# Altium PCB PCB1.PcbDoc
Units mm, origin at the board's own origin, x right, y up, seen from the top; angles counter-clockwise.
Board outline 103.55 x 81.04 mm, 2 copper layers (Top Layer, Bottom Layer); 36 components, 49 nets, 183 pads, 26 vias.
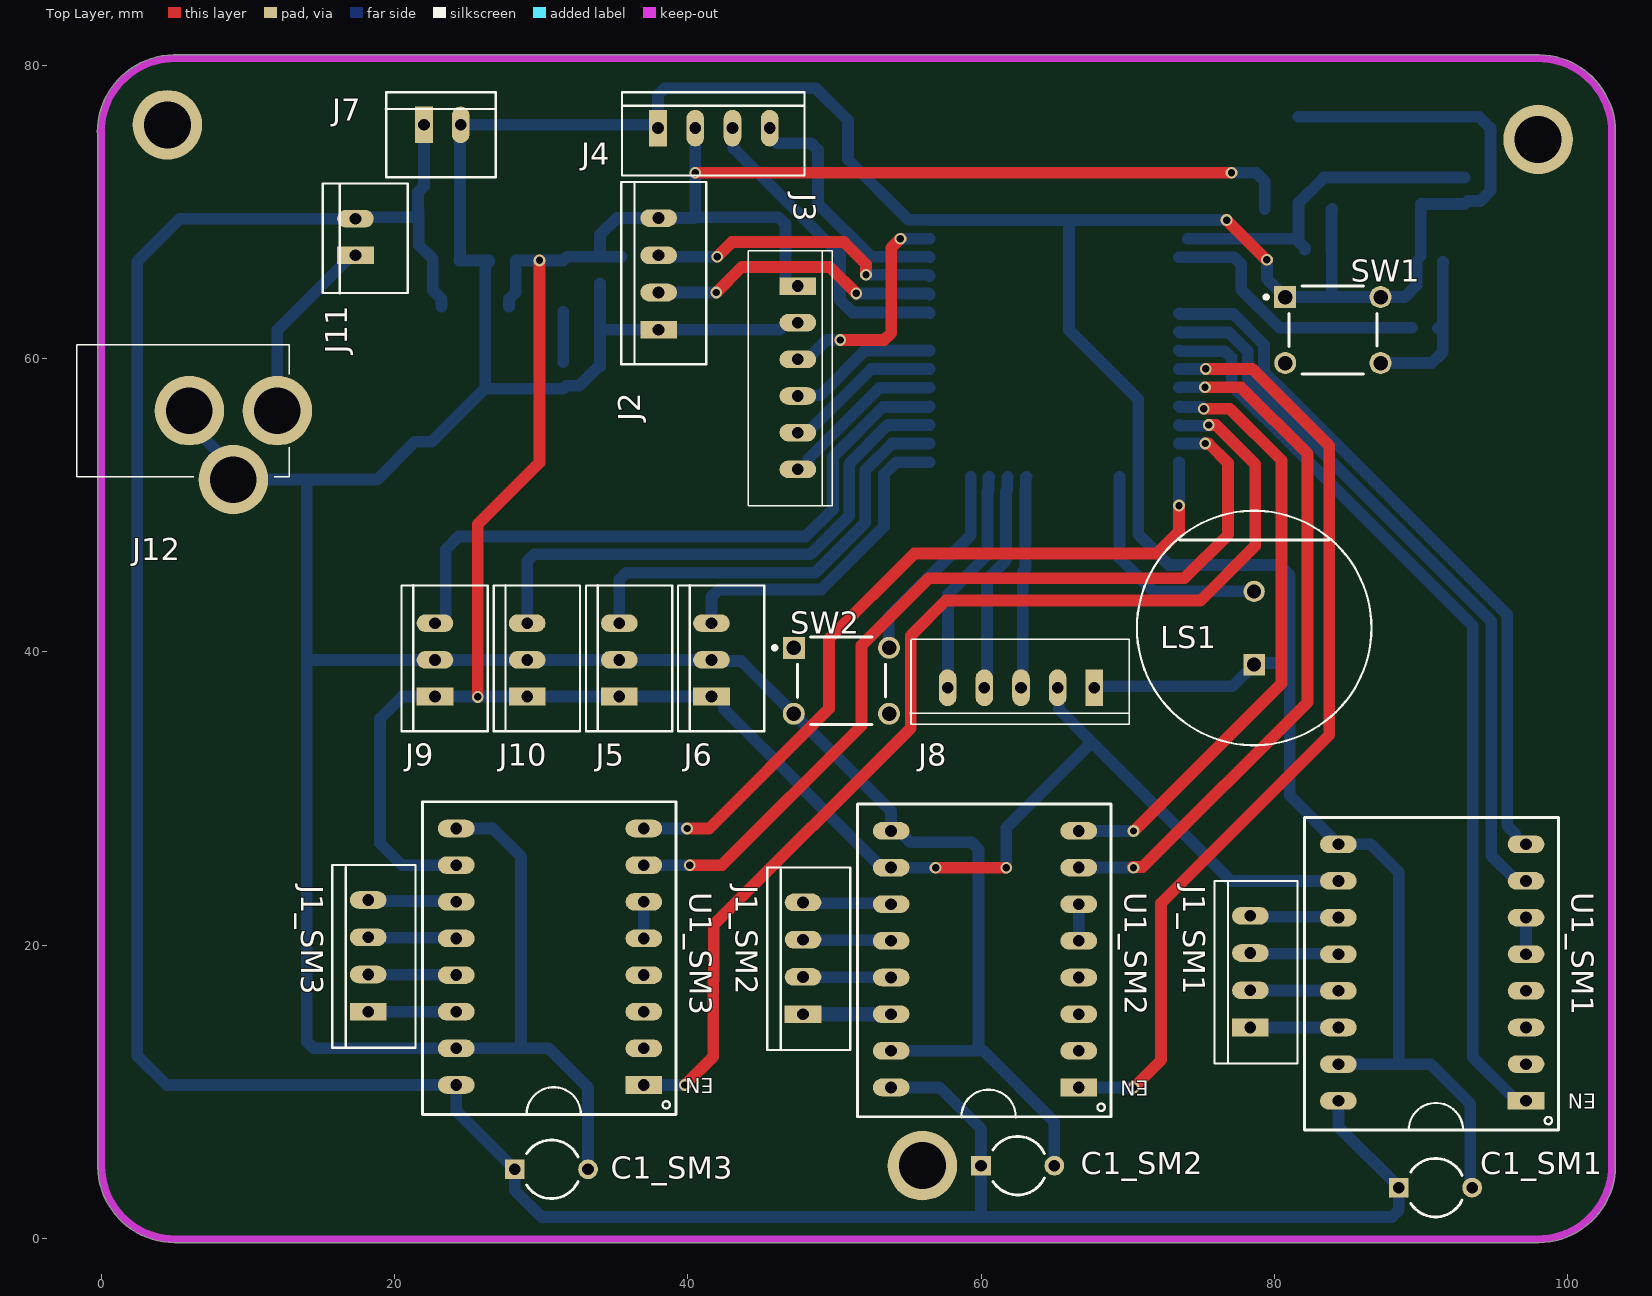
[diagram p0: Top Layer view]
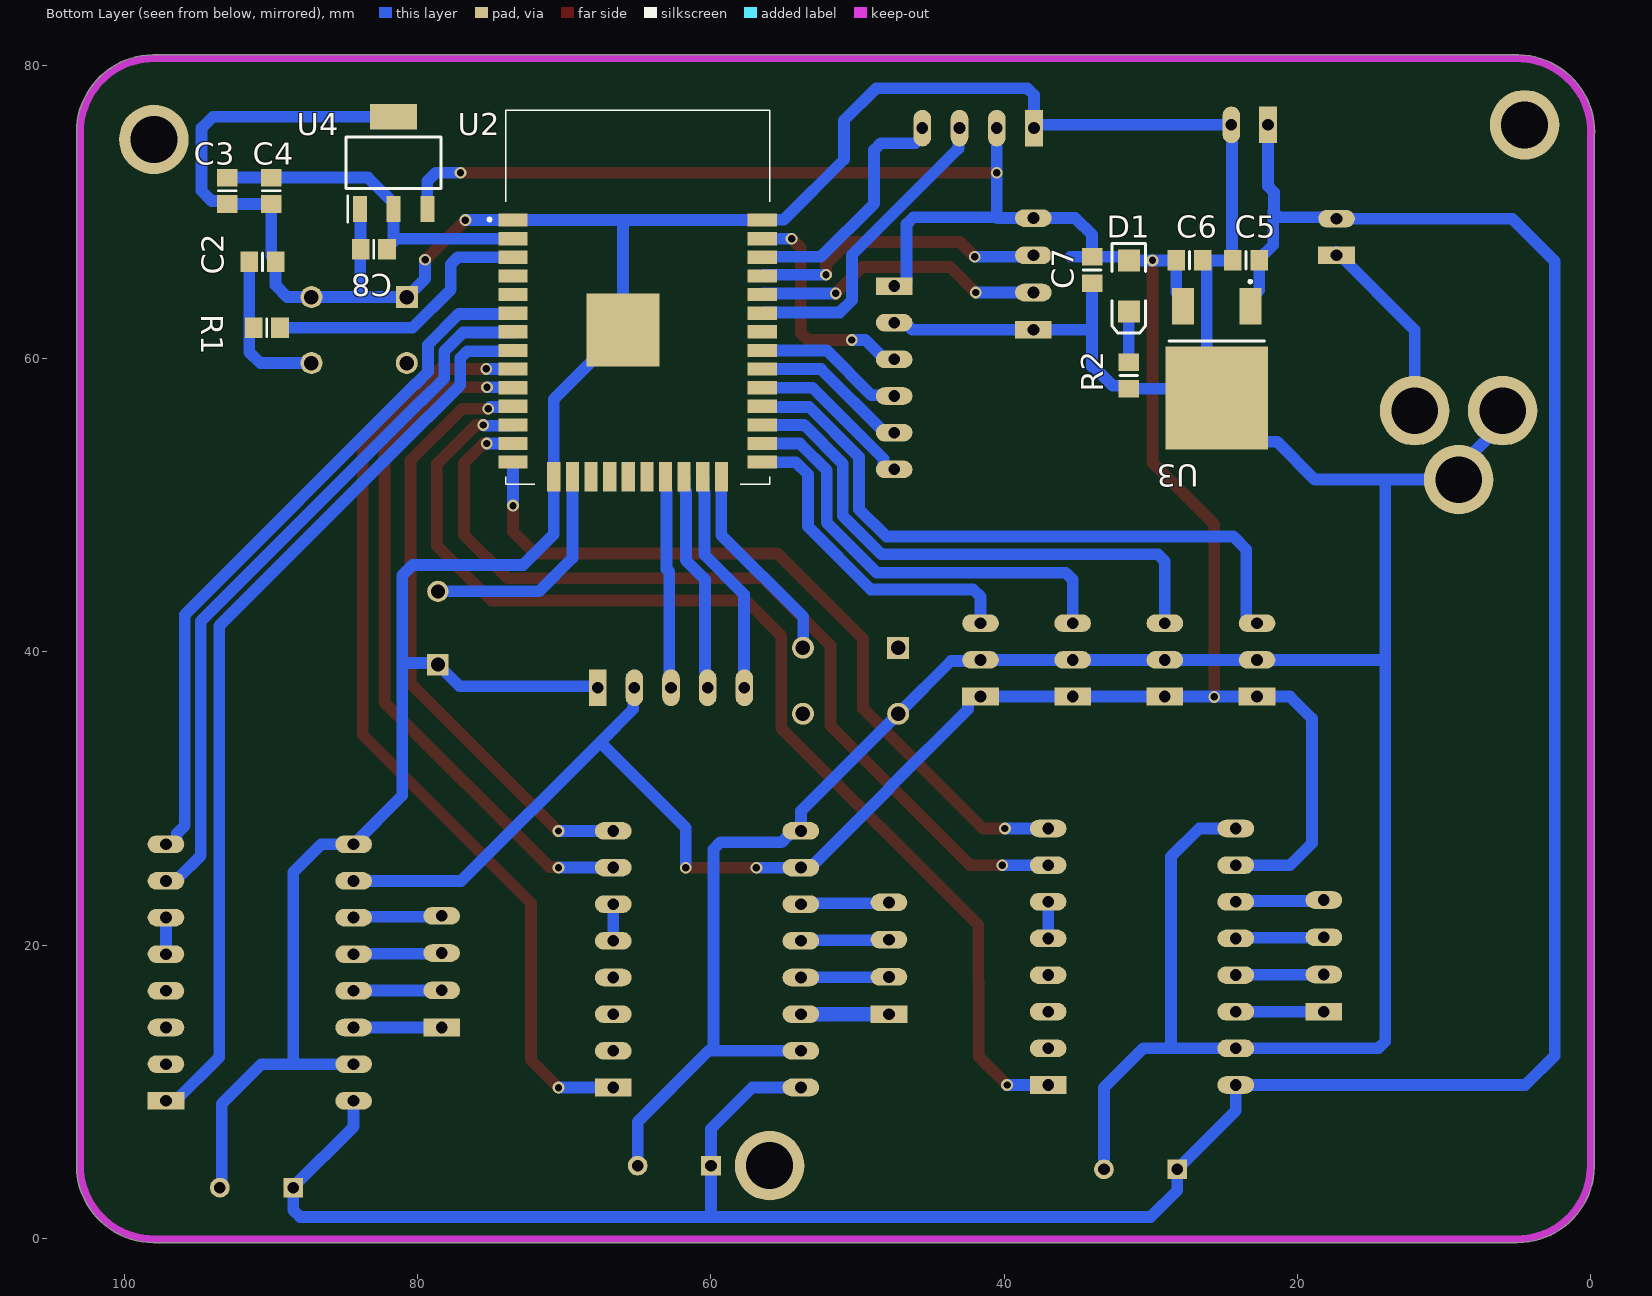
[diagram p1: Bottom Layer view, seen from below]
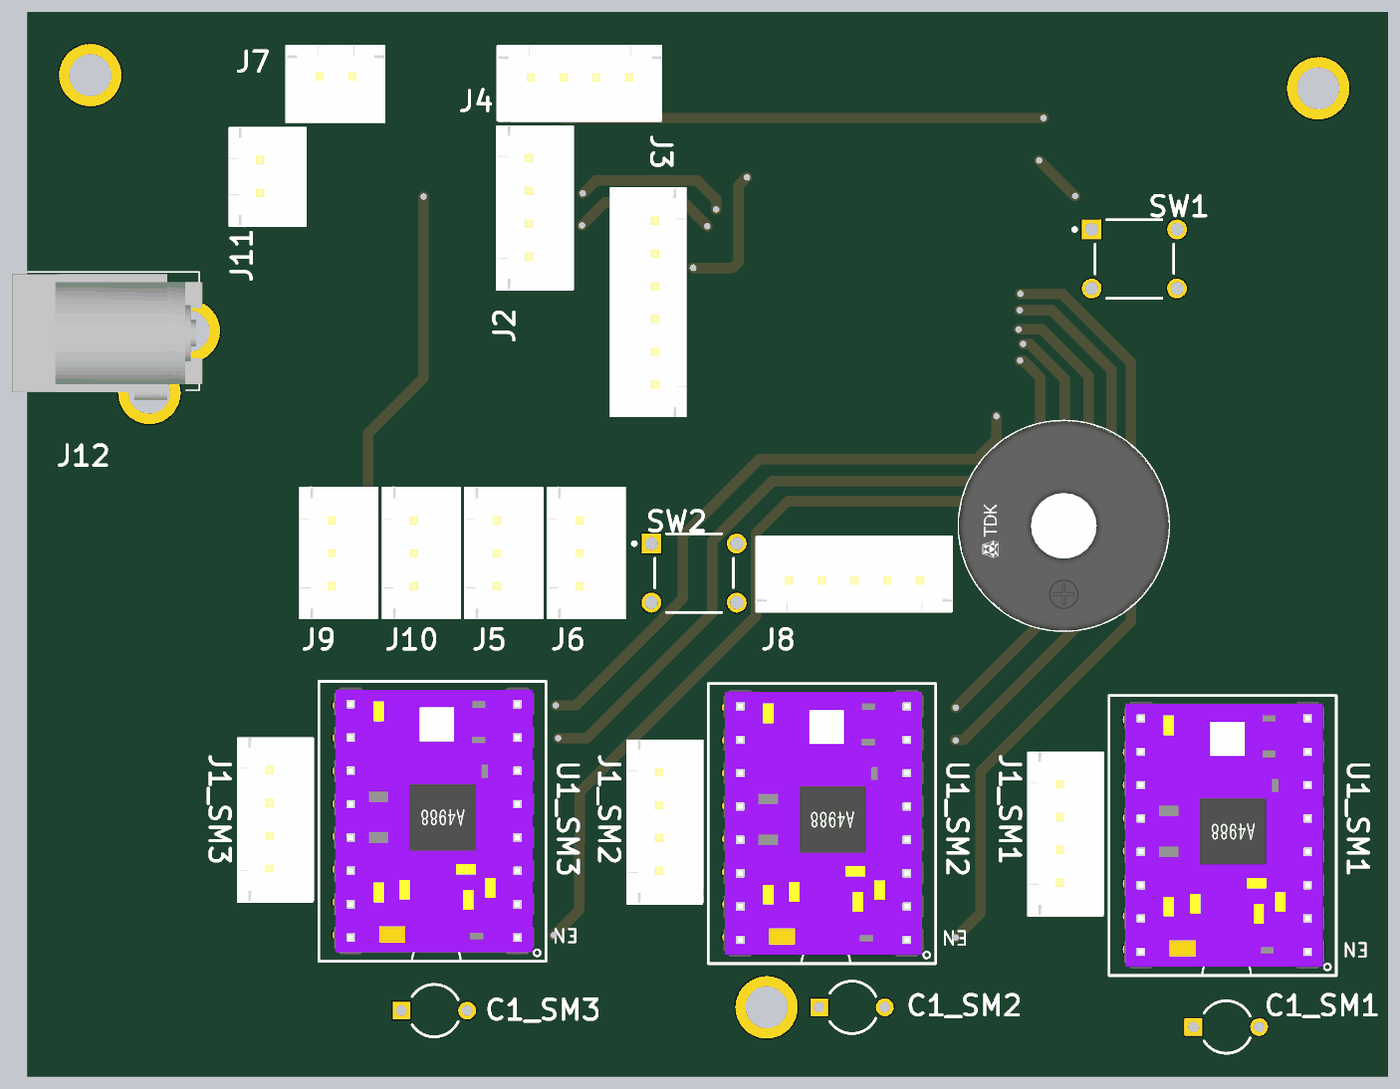
[diagram p2: 3D render of the assembled board from above, using the file's embedded part models]

## Layer stack, top to bottom
Top Solder: solder mask 0.0102, Solder Resist, Dk 3.5
Top Layer: signal copper 0.0356
Dielectric 1: dielectric 0.32, FR-4, Dk 4.8
Bottom Layer: signal copper 0.0356
Bottom Solder: solder mask 0.0102, Solder Resist, Dk 3.5

## Board outline
-0.25,4.869 cw(c-0.013,4.95) -0.263,4.95 -0.263,4.963 cw(c-0.013,4.963) -0.25,5.043 -0.25,75.339 cw(c-0.026,75.45) -0.276,75.45 cw(c5,75.45) 4.906,80.726 cw(c5,80.493) 5,80.744 97.983,80.744 cw(c97.983,80.493) 98.076,80.726 cw(c98,75.45) 103.276,75.45 cw(c103.026,75.45) 103.25,75.339 103.25,5.087 cw(c103.026,4.976) 103.276,4.976 cw(c98,4.976) 98.033,-0.3 cw(c98.026,-0.05) 98.026,-0.3 5,-0.3 cw(c5,-0.05) 4.998,-0.3 ccw(c5,4.95) 5,-0.3 4.998,-0.3 cw(c5,4.95)

## Design rules (kind name [scope] priority, off if disabled: settings)
Clearance [All] p1: gap=0.3 ignorepadtopadclearanceinfootprint=FALSE except(1: Arc-Fill Arc-Poly Arc-Region Track-Fill Track-Poly Track-Region)
PolygonConnect [All] p1: connectstyle=Relief reliefconductorwidth=0.254 reliefentries=4 polygonreliefangle="90 Angle" airgapwidth=0.254
RoomDefinition Sheet [InComponentClass('Sheet')] p1: confinementstyle=ConfineIn formatcopy=TRUE lockcomponents=FALSE outline -3.412,31.674 103.088,31.674 103.088,78.674 -3.412,78.674
RoomDefinition SM2 [InComponentClass('SM2')] p2: confinementstyle=ConfineIn formatcopy=TRUE lockcomponents=FALSE outline 44,30.45 44,1.95 72,1.95 72,30.45
RoomDefinition SM1 [InComponentClass('SM1')] p3: confinementstyle=ConfineIn formatcopy=TRUE lockcomponents=FALSE outline 75.588,0.674 102.588,0.674 102.588,29.174 75.588,29.174
RoomDefinition SM3 [InComponentClass('SM3')] p4: confinementstyle=ConfineIn formatcopy=TRUE lockcomponents=FALSE outline 15.301,30.587 15.301,2.087 42.301,2.087 42.301,30.587
RoutingVias [All] p1: holewidth=0.711 width=1.27 viastyle="Through Hole" minholewidth=0.711 minwidth=1.27 maxholewidth=0.711 maxwidth=1.27
SolderMaskExpansion [All] p1: expansion=0.102 istentingtop=FALSE
Width [All] p1: maxlimit=1 minlimit=0.8 preferedwidth=0.8
30 further rules are at their usual default settings.

## Classes and differential pairs
channel class SM1: SM1 SM2 SM3
component class SM3: C1_SM3 J1_SM3 U1_SM3
component class SM2: C1_SM2 J1_SM2 U1_SM2
component class Sheet: C2 C3 C4 C5 C6 C7 C8 D1 J2 J3 J4 J5 J6 J7 J8 J9 J10 J11 J12 LS1 R1 R2 SW1 SW2 U2 U3 U4
component class SM1: C1_SM1 J1_SM1 U1_SM1

## Components (designator, comment, footprint, x,y, rotation, side; value= is the part's Value field where it differs from the comment)
C1_SM1 "Cap2" CAPR5-4X5 91,3.45 r0 top value=100pF (schematic designator C1)
C1_SM2 "Cap2" CAPR5-4X5 62.5,4.95 r0 top value=100pF (schematic designator C1)
C1_SM3 "Cap2" CAPR5-4X5 30.695,4.7 r0 top value=100pF (schematic designator C1)
C2 "Cap Pol1" 6-0805_N 90.6,66.596 r180 bottom value=100pF
C3 "Cap Pol1" 6-0805_N 93,71.45 r270 bottom value=100pF
C4 "Cap Pol1" 6-0805_N 90,71.45 r270 bottom value=100pF
C5 "Cap Pol1" 6-0805_N 23.5,66.7 r0 bottom value=22uF
C6 "Cap Pol1" 6-0805_N 27.354,66.7 r180 bottom value=0.1uF
C7 "Cap Pol1" 6-0805_N 34.004,66.05 r270 bottom value=10uF
C8 "Cap Pol1" 6-0805_N 83,67.45 r0 bottom value=10uF
D1 "LED2" 3.2X1.6X1.1 31.5,64.95 r270 bottom
J1_SM1 "connector" JST_4P 78.37,14.373 r180 top (schematic designator J1)
J1_SM2 "connector" JST_4P 47.859,15.284 r180 top (schematic designator J1)
J1_SM3 "connector" JST_4P 18.195,15.45 r180 top (schematic designator J1)
J2 "TTL" TTL 38.004,61.968 r180 top
J3 "SD_CARD" SD_CARD 47.504,64.975 r0 top
J4 "LED_I2C" JST_4P 37.964,75.725 r90 top
J5 "Sharp IR" SHARP_IR 35.323,36.95 r180 top
J6 "Sharp IR" SHARP_IR 41.61,36.95 r180 top
J7 "FAN" JST_2P 22,75.95 r90 top
J8 "ENCODER" JST_5P 57.725,37.55 r270 top
J9 "Endstop" ENDSTOP 22.725,36.925 r180 top
J10 "Endstop" ENDSTOP 29.012,36.925 r180 top
J11 "PWR_SW" JST_2P 17.325,67.043 r180 top
J12 "DC_JACK" DC_JACK 12,56.45 r180 top
LS1 "SDC1610M5-01" FP-SDC1610M5-01-MFG 78.629,41.625 r90 top
R1 "Res1" 6-0805_N 90.3,62.1 r180 bottom value=1K
R2 "Res1" 6-0805_N 31.5,58.85 r90 bottom value=1K
SW1 "RESET_SW" TECO-1825910-6_V 84,61.95 r0 top
SW2 "1825910-6" TECO-1825910-6_V 50.475,38.025 r0 top
U1_SM1 "Stepper Motor Driver" A4988 97.176,9.373 r180 top (schematic designator U1)
U1_SM2 "Stepper Motor Driver" A4988 66.665,10.284 r180 top (schematic designator U1)
U1_SM3 "Stepper Motor Driver" A4988 37,10.45 r180 top (schematic designator U1)
U2 "ESP_32" ESP_SoC_Module 73.504,69.45 r180 bottom
U3 "LM7805" LM7805 25.5,60.437 r0 bottom
U4 "LM1117_3V3" LM1117_3V3 83.95,70.206 r90 bottom

## Footprints (in the part's own frame and the unit in brackets; to place one, negate y for a bottom-side part, rotate by r counter-clockwise, add the part's x,y. Pads: shape width x height; smd on the part's side, far side on the other; paste and mask are expansions set on the pad)
3.2X1.6X1.1 [mm] "SMT LED; 2 Flat Leads"
  rect 1.5x1.5 smd: 1(-1.75,0) 2(1.75,0)
  silkscreen extent -2.9,-1.15 3.2,1.15
6-0805_N [mm]
  rect 1.2x1.4 smd: 1(-0.9,0) 2(0.9,0)
  silkscreen extent 0,-0.6 0,0.6, body extent -1.07,-0.7 1.07,0.7, height 0.7
A4988 [mm]
  rect 2.5x1.2 hole 0.8: 1(0,0)
  oval 2.5x1.2 hole 0.8: 2(0,-2.5) 3(0,-5) 4(0,-7.5) 5(0,-10) 6(0,-12.5) 7(0,-15) 8(0,-17.5) 9(12.8,-17.5) 10(12.8,-15) 11(12.8,-12.5) 12(12.8,-10) 13(12.8,-7.5) 14(12.8,-5) 15(12.8,-2.5) 16(12.8,0)
  silkscreen extent -2.2,-19.33 15.1,2.03, body extent -1.3,-18.86 13.94,1.46, height 10.17
CAPR5-4X5 [mm] "Capacitor; 2 Leads"
  rect 1.35x1.35 hole 0.8: 1(-2.5,0)
  round 1.35 hole 0.8: 2(2.5,0)
  silkscreen extent -1.69,-2 1.82,2
DC_JACK [mm]
  round 4.743 hole 3.162: 1(0,0) 2(6,0) 3(3,4.7)
  silkscreen extent -0.8,-4.5 13.7,4.5, body extent -1.05,-4.34 13.45,5.21, height 11.25
ENDSTOP [mm]
  rect 2.5x1.2 hole 0.8: 1(-0.025,-0.025)
  oval 2.5x1.2 hole 0.8: 2(-0.025,-2.525) 3(-0.025,-5.025)
  silkscreen extent -3.63,-7.63 2.25,2.35, body extent -3.55,-7.55 2.2,2.35, height 7.01
ESP_SoC_Module [mm]
  rect 2x0.9 smd: 1(0,0) 2(0,-1.27) 3(0,-2.54) 4(0,-3.81) 5(0,-5.08) 6(0,-6.35) 7(0,-7.62) 8(0,-8.89) 9(0,-10.16) 10(0,-11.43) 11(0,-12.7) 12(0,-13.97) 13(0,-15.24) 14(0,-16.51) 25(17,-16.51) 26(17,-15.24) 27(17,-13.97) 28(17,-12.7) 29(17,-11.43) 30(17,-10.16) 31(17,-8.89) 32(17,-7.62) 33(17,-6.35) 34(17,-5.08) 35(17,-3.81) 36(17,-2.54) 37(17,-1.27) 38(17,0)
  rect 0.9x2 smd: 15(2.785,-17.51) 16(4.055,-17.51) 17(5.325,-17.51) 18(6.595,-17.51) 19(7.865,-17.51) 20(9.135,-17.51) 21(10.405,-17.51) 22(11.675,-17.51) 23(12.945,-17.51) 24(14.215,-17.51)
  rect 5x5 smd: 39(7.5,-7.5)
  silkscreen extent -1.7,-18.01 17.5,7.49, body extent -0.5,-17.98 17.5,7.52, height 3.1
FP-SDC1610M5-01-MFG [mm]
  rect 1.45x1.45 hole 0.95 paste-1000 mask+0: 1(-2.5,0)
  round 1.45 hole 0.95 paste-1000 mask+0: 2(2.5,0)
  silkscreen extent -8,-8 8,8, body extent -8.1,-8.1 8.1,8.1, height 0.25
JST_2P [mm]
  rect 2.5x1.2 hole 0.8: 1(0,0)
  oval 2.5x1.2 hole 0.8: 2(0,-2.5)
  silkscreen extent -3.58,-4.9 2.22,2.6, body extent -3.5,-4.9 2.25,2.5, height 7.01
JST_4P [mm]
  rect 2.5x1.2 hole 0.8: 1(0,0)
  oval 2.5x1.2 hole 0.8: 2(0,-2.54) 3(0,-5.08) 4(0,-7.62)
  silkscreen extent -3.22,-10 2.45,2.45, body extent -3.35,-10.02 2.4,2.38, height 7.01
JST_5P [mm]
  rect 2.5x1.2 hole 0.8: 1(0,10)
  oval 2.5x1.2 hole 0.8: 2(0,7.5) 3(0,5) 4(0,2.5) 5(0,0)
  silkscreen extent -3.3,-2.58 2.47,12.4, body extent -3.3,-2.47 2.45,12.43, height 6.91
LM1117_3V3 [mm]
  rect 1.75x0.95 smd: 1(0,0) 2(0,-2.3) 3(0,-4.6)
  rect 1.75x3.2 smd: 4(6.3,-2.3)
  silkscreen extent -0.88,-5.55 4.9,0.95, body extent -0.35,-5.55 6.65,0.95, height 1.68
LM7805 [mm]
  rect 1.5x2.5 smd: 1(-2.3,-3.125) 2(2.3,-3.125)
  rect 7x7 smd: 3(0,3.125)
  silkscreen extent -3.25,-4.91 3.25,-0.77, body extent -3.25,-3.9 3.25,5.6, height 2.3
SD_CARD [mm]
  rect 2.5x1.2 hole 0.8: 1(0,-0.025)
  oval 2.5x1.2 hole 0.8: 2(0,-2.525) 3(0,-5.025) 4(0,-7.525) 5(0,-10.025) 6(0,-12.525)
  silkscreen extent -3.4,-15.03 2.35,2.4, body extent -3.4,-15.05 2.35,2.35, height 7.01
SHARP_IR [mm]
  rect 2.5x1.2 hole 0.8: 1(0,0)
  oval 2.5x1.2 hole 0.8: 2(0,-2.5) 3(0,-5)
  silkscreen extent -3.61,-7.6 2.27,2.37, body extent -3.53,-7.52 2.23,2.38, height 7.01
TECO-1825910-6_V [mm] "Switch, 4-Leads, Body 5.99x5.99mm"
  rect 1.5x1.5 hole 0.99: 1(-3.25,2.25)
  round 1.5 hole 0.99: 2(3.25,2.25) 3(-3.25,-2.25) 4(3.25,-2.25)
  silkscreen extent -4.67,-2.99 2.99,3, body extent -3,-2.99 2.99,3, height 5
TTL [mm]
  rect 2.5x1.2 hole 0.8: 1(0,0)
  oval 2.5x1.2 hole 0.8: 2(0,-2.54) 3(0,-5.08) 4(0,-7.62)
  silkscreen extent -3.25,-10.08 2.55,2.35, body extent -3.3,-10.12 2.45,2.28, height 7.01

## Part data
C1_SM1 C1_SM2 C1_SM3: "Capacitor", PackageDescription="Capacitor; 2 Leads", PackageReference=CAPR5-4X5, Published=23-Sep-2002, Publisher="Altium Limited"
C2 C3 C4 C5 C6 C7 C8: "Polarized Capacitor (Radial)", LatestRevisionDate=17-Jul-2002, LatestRevisionNote="Re-released for DXP Platform.", PackageDescription="Polarized Capacitor (Radial); 2 Leads", PackageReference=RB7.6-15, Published=8-Jun-2000, Publisher="Altium Limited"
D1: "Typical RED, GREEN, YELLOW, AMBER GaAs LED", LatestRevisionDate=17-Jul-2002, LatestRevisionNote="Re-released for DXP Platform.", PackageDescription="SM LED; 2 Flat Leads", PackageReference=3.2X1.6X1.1, PackageVersion=Feb-2002, Published=8-Jun-2000, Publisher="Altium Limited"
J1_SM1 J1_SM2 J1_SM3 J4: library part JST_4P
J5 J6: library part SHARP_IR
J7 J11: library part JST_2P
J8: library part JST_5P
J9 J10: library part ENDSTOP
LS1: library part CMP-08413-000008-1, "AUDIO MAGNETIC INDICATOR 4-8V TH", Frequency=2.4kHz, Max Operating Temperature=70°C, Max Supply Current=30mA, Min Operating Temperature=-10°C, Nominal Supply Voltage (DC)=5V, Diameter=16mm, Height=10mm, Input Type=DC, Lead Free="Lead Free", Mount="Through Hole", Number of Pins=2, Number of Terminals/Pins=2, Operating Supply Current=30mA, Packaging=Tray, Sensing Method=Magnetic, Series=SDC, Termination="PC Pins", Voltage Rating=5V
R1 R2: "Resistor", LatestRevisionDate=17-Jul-2002, LatestRevisionNote="Re-released for DXP Platform.", PackageDescription="Axial Device, Thru-Hole; 2 Leads; 0.3 in Pin Spacing", PackageReference=AXIAL-0.3, Published=8-Jun-2000, Publisher="Altium Limited"
SW1: library part CMP-1684-00021-1, "Tact Switch, SPST-NO, 0.05 A, -35 to 85 degC, 4-Pin THD, RoHS, Bulk", Actuator Color=Black, Contact Rating @ Voltage=0.05A@24VDC, Dielectric Strength=500VAC, Manufacturer="TE Connectivity", Maximum AC Voltage Rating=N/A, Maximum Contact Resistance=100mOhm, Maximum DC Voltage Rating=24V, Minimum Insulation Resistance=100MOhm, Operating Temperature=-35to85C, Package Description="4-Pin Through Hole Device, Body 5.99 x 5.99 mm, Pitch 6.5 mm", Package Reference=THD, Part No=1825910-6, Actuator Length=1.4mm, Actuator Material=PolybutyleneTerephthalate, Actuator Style=RoundButton, Base Material=N/A, Body Orientation=Straight, Bushing Type=Unthreaded, Contact Material=CopperAlloy, Contact Plating=Silver, Datasheet URL=http://www.te.com/commerce/DocumentDelivery/DDEController?Action=showdoc&DocId=Customer+Drawing%7F1825910%7FC9%7Fpdf%7FEnglish%7FENG_CD_1825910_C9.pdf%7F1825910-6, Datasheet Version="Rev. C9", Dimension=5.99x5mm, Electrical Life=100000Cycles, Family=1825910, Function=MomentaryContact, Housing Material=N/A, Illumination=N/R, Manufacturer URL=http://www.te.com, Mechanical Life=100000Cycles, Mounting=ThroughHole, Packaging=N/A, Pole Throw Configuration=SPST, Product Weight=N/A, RoHS=Yes, Seal Description=N/A, Seal Location=N/A, Switch Configuration=OFF(ON), Terminal Type=PCPins, Thread Size=N/R
SW2: library part CMP-1684-00021-1, "Tact Switch, SPST-NO, 0.05 A, -35 to 85 degC, 4-Pin THD, RoHS, Bulk", Actuator Color=Black, Contact Rating @ Voltage=0.05A@24VDC, Dielectric Strength=500VAC, Manufacturer="TE Connectivity", Maximum AC Voltage Rating=N/A, Maximum Contact Resistance=100mOhm, Maximum DC Voltage Rating=24V, Minimum Insulation Resistance=100MOhm, Operating Temperature=-35to85C, Package Description="4-Pin Through Hole Device, Body 5.99 x 5.99 mm, Pitch 6.5 mm", Package Reference=THD, Actuator Length=1.4mm, Actuator Material=PolybutyleneTerephthalate, Actuator Style=RoundButton, Base Material=N/A, Body Orientation=Straight, Bushing Type=Unthreaded, Contact Material=CopperAlloy, Contact Plating=Silver, Datasheet URL=http://www.te.com/commerce/DocumentDelivery/DDEController?Action=showdoc&DocId=Customer+Drawing%7F1825910%7FC9%7Fpdf%7FEnglish%7FENG_CD_1825910_C9.pdf%7F1825910-6, Datasheet Version="Rev. C9", Dimension=5.99x5mm, Electrical Life=100000Cycles, Family=1825910, Function=MomentaryContact, Housing Material=N/A, Illumination=N/R, Manufacturer URL=http://www.te.com, Mechanical Life=100000Cycles, Mounting=ThroughHole, Packaging=N/A, Part No=1825910-6, Pole Throw Configuration=SPST, Product Weight=N/A, RoHS=Yes, Seal Description=N/A, Seal Location=N/A, Switch Configuration=OFF(ON), Terminal Type=PCPins, Thread Size=N/R
U1_SM1 U1_SM2 U1_SM3: library part A4988
U2: library part ESP_SoC_Module

## Free pads (board coordinates)
  round 4.743 hole 3.2: 15(4.5,75.95) 15(56,4.95) 15(98,74.95)

## Via types
v1: diameter 0.8, hole 0.5, Top Layer to Bottom Layer, 26 vias

## Nets (pads, with @x,y where several pads share a name; then routed paths per layer and width w, separated by ;. In a path a pad name is that pad's centre, name@x,y a point inside that pad or via, vN(x,y) a via of type N, cw(c..) or ccw(c..) an arc to the next point about the centre after c; other vN are vias at no path point)
+3V3: C3.1 C4.1 C8.1 U2.2 U4.2 | length 23
  Bottom Layer w0.8: U2.2@74.1,68.18 81.47,68.18 C8.1@81.65,68 ; C8.1 82.1,67.55 C8.1@81.65,68 ; C3.1 C4.1 83.394,72.35 81.65,70.606 U4.2 C8.1@81.65,68
+5: C6.1 C7.1 D1.1 J2.4 J3.1 J4.2 J5.1 J6.1 J8.2 J9.1 J10.1 U1_SM1.10 U1_SM2.10 U1_SM3.10 U3.2 U4.3 | length 208.4
  Top Layer w0.8: v1(25.675,36.925) 25.675,48.7 29.877,52.902 v1(29.877,66.7) ; v1(40.504,72.685) v1(77.085,72.685) ; v1(56.9,25.275) v1(61.725,25.275)
  Bottom Layer w0.8: U1_SM3.10 20.5,25.45 19,26.95 19,35.45 20.5,36.95 J9.1 J10.1 42.26,36.95 42.46,36.75 42.46,36.1 47.799,30.761 47.799,30.7 53.215,25.284 U1_SM2.10 53.874,25.275 v1(56.9,25.275) ; U3.2 27.8,64.062 28.254,64.516 C6.1 v1(29.877,66.7) D1.1 31.75,66.95 35.5,66.95 ; C7.1 34.004,68.45 35.143,69.588 40.448,69.588 40.504,69.645 ; J4.2 v1(40.504,72.685) 40.504,69.645 ; J3.1 46.854,64.95 46.654,65.15 46.654,69.176 46.186,69.645 40.504,69.645 ; v1(61.725,25.275) 61.725,28 67.562,33.838 ; J8.2 65.302,37.473 65.302,36.098 67.562,33.838 ; v1(77.085,72.685) 78.771,72.685 79.35,72.106 U4.3 ; U1_SM1.10 77.027,24.373 67.562,33.838
+12: C1_SM1.1 C1_SM2.1 C1_SM3.1 C5.1 J7.1 J11.2 U1_SM1.16 U1_SM2.16 U1_SM3.16 U3.1 | length 203.2
  Bottom Layer w0.8: 21.6,70 21.6,71.35 22,71.75 J7.1 ; U3.1 23.2,64.062 22.6,64.662 22.6,66.8 21.65,67.75 21.65,69.65 21.65,70.05 21.25,69.65 18.364,69.65 18.334,69.62 17.402,69.62 J11.2 5.343,69.543 3.975,68.175 2.45,66.65 2.45,12.45 4.45,10.45 U1_SM3.16 24.2,8.695 C1_SM3.1 28.195,3.255 30,1.45 60,1.45 ; U1_SM2.16 57.166,10.284 60,7.45 C1_SM2.1 60,1.45 ; U1_SM1.16 84.376,7.618 C1_SM1.1@88.522,3.472 ; C1_SM1.1 88.5,1.919 88.031,1.45 60,1.45
BUZZ: LS1.2 U2.16 | length 15.7
  Bottom Layer w0.8: U2.16 69.449,46.401 71.725,44.125 LS1.2
CS_SD: J3.6 U2.29 | length 11.6
  Bottom Layer w0.8: J3.6 48.046,52.45 48.231,52.635 48.231,53.177 53.074,58.02 U2.29
DIR1: U1_SM1.8 U2.6 | length 48.5
  Bottom Layer w0.8: U2.6 73.554,63.05 77.203,63.05 79.3,60.953 79.3,59.099 80.149,58.25 80.186,58.25 95.9,42.536 95.9,28.149 96.449,27.6 96.449,27.058 96.634,26.873 U1_SM1.8
DIR2: U1_SM2.8 U2.11 | length 41.7
  Top Layer w0.8: v1(70.4,27.775) 70.425,27.775 80.5,37.85 80.5,53.05 76.965,56.585 v1(75.185,56.585)
  Bottom Layer w0.8: U1_SM2.8 70.391,27.784 v1(70.4,27.775) ; U2.11 73.554,56.7 75.069,56.7 v1(75.185,56.585)
DIR3: U1_SM3.8 U2.14 | length 52.4
  Top Layer w0.8: v1(39.95,27.95) 41.451,27.95 49.625,36.124 49.625,40.875 55.45,46.7 72,46.7 73.5,48.2 v1(73.5,49.975)
  Bottom Layer w0.8: U1_SM3.8 v1(39.95,27.95) ; v1(73.5,49.975) 73.504,49.979 U2.14
EN1: U1_SM1.1 U2.8 | length 63.2
  Bottom Layer w0.8: U2.8 73.554,60.51 76.631,60.51 77.1,60.041 77.1,58.188 79.238,56.05 79.275,56.05 93.55,41.775 93.55,12.349 96.526,9.373 U1_SM1.1
EN2: U1_SM2.1 U2.9 | length 65.5
  Top Layer w0.8: v1(70.4,10.275) 72.275,12.15 72.275,22.85 83.75,34.325 83.75,54.05 78.5,59.3 v1(75.325,59.3)
  Bottom Layer w0.8: U1_SM2.1 v1@70.391,10.284 ; U2.9 75.315,59.29 v1(75.325,59.3)
EN3: U1_SM3.1 U2.12 | length 77.8
  Top Layer w0.8: v1(39.8,10.45) 41.725,12.375 41.725,17.55 41.775,17.6 41.775,21.375 55.2,34.8 55.2,41.1 57.6,43.5 74.975,43.5 78.7,47.225 78.7,52.8 76.025,55.475 v1(75.525,55.475)
  Bottom Layer w0.8: U1_SM3.1 v1(39.8,10.45) ; U2.12 73.554,55.43 75.48,55.43 v1(75.525,55.475)
ES_1: J9.3 U2.28 | length 44.8
  Bottom Layer w0.8: J9.3 23.292,41.95 23.477,42.135 23.477,46.981 24.367,47.872 48.047,47.872 49.904,49.729 49.904,53.294 53.31,56.7 56.454,56.7 U2.28
ES_2: J10.3 U2.27 | length 37.6
  Bottom Layer w0.8: J10.3 29.037,46.181 29.505,46.65 48.381,46.65 51.004,49.274 51.004,52.839 53.646,55.48 U2.27
GND: C1_SM1.2 C1_SM2.2 C1_SM3.2 C2.2 C3.2 C4.2 C5.2 C6.2 C7.2 C8.2 J2.1 J3.2 J4.1 J5.2 J6.2 J7.2 J8.1 J9.2 J10.2 J12.2 J12.3 LS1.1 R2.1 SW1.1 SW1.2 SW2.3 U1_SM1.9 U1_SM1.15 U1_SM2.9 U1_SM2.15 U1_SM3.9 U1_SM3.15 U2.1 U2.15 U2.38 U2.39 U3.3 U4.1 U4.4 | length 450.8
  Top Layer w0.8: v1(76.75,69.45) 79.45,66.75 v1(79.5,66.75)
  Bottom Layer w0.8: J12.2 6,55.6 9,52.6 J12.3 13.9,51.75 ; U1_SM3.9@24.5,27.95 26.701,27.95 28.624,26.027 28.624,12.95 ; C1_SM3.2 33.195,10.255 30.5,12.95 28.624,12.95 ; 33.952,59.502 32.6,58.15 31.7,58.15 R2.1 U3.3@26.138,57.95 ; 34.004,59.45 34.004,61.95 ; C7.2 34.004,61.95 ; J4.1 J4.1@37.964,75.75 ; J3.2 46.746,62.45 46.264,61.968 J2.1 34.023,61.968 34.004,61.95 ; U1_SM2.15 60.166,12.784 65,7.95 C1_SM2.2 ; 59.825,12.784 59.825,26.536 59.356,27.005 55.184,27.005 54.715,27.473 54.715,27.476 54.407,27.784 U1_SM2.9 53.865,29.135 SW2.3 43.627,39.373 41.686,39.373 J6.2 J5.2 J10.2 J9.2 14,39.45 ; J8.1 67.825,37.55 67.925,37.65 77.154,37.65 78.742,39.238 81.05,39.238 ; v1(76.75,69.45) U2.1 66.004,69.45 ; v1(79.5,66.75) 79.5,65.45 SW1.1 83.925,64.2 ; U4.4 93.969,76.506 94.75,75.725 94.75,71.45 94.05,70.75 93.2,70.75 C3.2 C4.2 C2.2@90,66.996 ; C8.2 83.9,70.156 U4.1 ; C8.2@83.925,67.475 83.925,64.2 ; U1_SM1.15 88.5,11.873 ; C2.2 89.7,65 88.9,64.2 SW1.2 83.925,64.2 ; C1_SM1.2@93.37,3.45 93.37,9.179 90.676,11.873 88.5,11.873 ; 13.9,51.75 18.8,51.75 21.382,54.332 22.521,54.332 U3.3 U3.3@26.138,57.95 ; 13.9,51.75 14,51.65 14,39.45 ; 14,39.45 14,13.419 14.469,12.95 U1_SM3.15 28.624,12.95 ; U3.3@26.138,57.95 26.175,57.987 26.175,66.321 26.454,66.6 C6.2 26.175,66.7 C5.2 24.45,66.75 24.45,75.9 J7.2 37.764,75.95 J4.1@37.964,75.75 ; J4.1@37.964,75.75 37.964,77.981 38.433,78.45 48.725,78.45 50.925,76.25 50.925,73.585 55.036,69.474 56.481,69.474 U2.38 66.004,69.45 ; 66.004,69.45 U2.39 70.719,57.235 U2.15 70.719,48.006 72.8,45.925 80.35,45.925 81.05,45.225 81.05,39.238 ; 81.05,39.238 81.05,30.199 U1_SM1.9 86.577,26.873 88.5,24.95 88.5,11.873
MISO: J3.4 U2.31 | length 10.3
  Bottom Layer w0.8: J3.4 47.552,57.498 49.052,57.498 52.114,60.56 U2.31
MOSI: J3.3 U2.37 | length 15.8
  Top Layer w0.8: v1(50.404,61.275) 53.406,61.275 53.875,61.744 53.875,67.55 v1(54.5,68.175)
  Bottom Layer w0.8: J3.3 48.154,59.95 49.479,61.275 v1(50.404,61.275) ; v1(54.5,68.175) 56.499,68.175 U2.37
NetC2_1: C2.1 R1.1 SW1.4 | length 10.8
  Bottom Layer w0.8: SW1.4 90.75,59.7 91.5,60.45 C2.1 C2.1@91.523,66.573 ; R1.1@91.177,62.077 R1.1
NetD1_2: D1.2 R2.2 | length 3.4
  Bottom Layer w0.8: R2.2 D1.2
NetJ1_SM1_1: J1_SM1.1 U1_SM1.14 | length 6
  Bottom Layer w0.8: J1_SM1.1 U1_SM1.14
NetJ1_SM1_2: J1_SM1.2 U1_SM1.13 | length 6
  Bottom Layer w0.8: J1_SM1.2 78.39,16.893 84.356,16.893 U1_SM1.13
NetJ1_SM1_3: J1_SM1.3 U1_SM1.12 | length 6
  Bottom Layer w0.8: J1_SM1.3 78.41,19.413 84.336,19.413 U1_SM1.12
NetJ1_SM1_4: J1_SM1.4 U1_SM1.11 | length 6.1
  Bottom Layer w0.8: J1_SM1.4 78.43,21.933 84.316,21.933 U1_SM1.11
NetJ1_SM2_1: J1_SM2.1 U1_SM2.14 | length 6
  Bottom Layer w1: J1_SM2.1 U1_SM2.14
NetJ1_SM2_2: J1_SM2.2 U1_SM2.13 | length 6
  Bottom Layer w0.8: J1_SM2.2 47.879,17.804 53.845,17.804 U1_SM2.13
NetJ1_SM2_3: J1_SM2.3 U1_SM2.12 | length 6
  Bottom Layer w0.8: J1_SM2.3 47.899,20.324 53.825,20.324 U1_SM2.12
NetJ1_SM2_4: J1_SM2.4 U1_SM2.11 | length 6.1
  Bottom Layer w0.8: J1_SM2.4 47.919,22.844 53.805,22.844 U1_SM2.11
NetJ1_SM3_1: J1_SM3.1 U1_SM3.14 | length 6
  Bottom Layer w0.8: J1_SM3.1 U1_SM3.14
NetJ1_SM3_2: J1_SM3.2 U1_SM3.13 | length 6
  Bottom Layer w0.8: J1_SM3.2 18.215,17.97 24.18,17.97 U1_SM3.13
NetJ1_SM3_3: J1_SM3.3 U1_SM3.12 | length 6
  Bottom Layer w0.8: J1_SM3.3 18.235,20.49 24.16,20.49 U1_SM3.12
NetJ1_SM3_4: J1_SM3.4 U1_SM3.11 | length 6.1
  Bottom Layer w0.8: J1_SM3.4 18.255,23.01 24.14,23.01 U1_SM3.11
NetJ11_1: J11.1 J12.1 | length 13
  Bottom Layer w0.8: J12.1 12,61.95 J11.1@17.325,67.275
NetR1_2: R1.2 U2.3 | length 18.9
  Bottom Layer w0.8: U2.3 77.281,66.91 77.75,66.441 77.75,64.71 80.36,62.1 R1.2
NetSW2_2: SW2.2 U2.24 | length 14
  Bottom Layer w0.8: SW2.2 53.704,40.296 53.704,42.379 59.289,47.964 U2.24
NetU1_SM1_5: U1_SM1.5 U1_SM1.6 | length 2.5
  Bottom Layer w0.8: U1_SM1.5 U1_SM1.6
NetU1_SM2_5: U1_SM2.5 U1_SM2.6 | length 2.5
  Bottom Layer w0.8: U1_SM2.5 U1_SM2.6
NetU1_SM3_5: U1_SM3.5 U1_SM3.6 | length 2.5
  Bottom Layer w0.8: U1_SM3.5 U1_SM3.6
OUT_A: J8.3 U2.21 | length 14.5
  Bottom Layer w0.8: J8.3 62.802,37.627 62.802,38.559 62.85,38.608 62.85,45.475 63.028,45.653 63.028,50.984 63.049,51.006 63.049,51.89 U2.21
OUT_B: J8.4 U2.22 | length 14.7
  Bottom Layer w0.8: J8.4@60.302,37.883 60.302,38.559 60.41,38.668 60.41,44.96 61.709,46.259 61.709,50.936 61.779,51.006 61.779,51.89 U2.22
RXD: J2.3 U2.35 | length 20.3
  Top Layer w0.8: v1(42.004,66.95) 43.004,67.95 50.65,67.95 52.154,66.446 v1(52.154,65.725)
  Bottom Layer w0.8: J2.3 38.103,66.95 v1(42.004,66.95) ; v1(52.154,65.725) 56.419,65.725 U2.35
SCK: J3.5 U2.30 | length 10.8
  Bottom Layer w0.8: J3.5 48.154,54.95 52.494,59.29 U2.30
SCL: J4.4 U2.36 | length 17
  Bottom Layer w0.8: J4.4 45.584,75.183 46.067,74.7 48.406,74.7 48.875,74.231 48.875,70.579 52.504,66.95 56.464,66.95 U2.36
SDA: J4.3 U2.33 | length 21.3
  Bottom Layer w0.8: J4.3 43.121,75.648 43.121,74.333 50.379,67.075 50.379,63.994 51.224,63.15 56.454,63.15 U2.33
SHARP1: J5.3 U2.26 | length 30.1
  Bottom Layer w0.8: J5.3 35.323,44.931 35.792,45.4 48.686,45.4 52.104,48.818 52.104,52.383 53.931,54.21 U2.26
SHARP2: J6.3 U2.25 | length 22.6
  Bottom Layer w0.8: J6.3 41.61,43.75 42.11,44.25 49.092,44.25 53.375,48.533 53.375,52.098 54.217,52.94 U2.25
STEP1: U1_SM1.7 U2.7 | length 49.6
  Bottom Layer w0.8: U2.7 73.554,61.78 76.917,61.78 78.2,60.497 78.2,58.644 79.694,57.15 79.731,57.15 94.8,42.081 94.8,26.099 96.395,24.504 97.045,24.504 U1_SM1.7
STEP2: U1_SM2.7 U2.10 | length 47.9
  Top Layer w0.8: v1@70.35,25.325 71.025,25.325 82.275,36.575 82.275,53.5 77.725,58.05 v1(75.275,58.05)
  Bottom Layer w0.8: U1_SM2.7 v1@70.391,25.284 ; U2.10 73.534,58.05 v1(75.275,58.05)
  other v1: 70.4,25.275
STEP3: U1_SM3.7 U2.13 | length 61.2
  Top Layer w0.8: v1(40.125,25.45) 42.325,25.45 51.85,34.975 51.85,40.451 56.424,45.025 73.875,45.025 76.85,48 76.85,52.875 75.515,54.21 v1(75.3,54.21)
  Bottom Layer w0.8: U1_SM3.7 v1(40.125,25.45) ; U2.13 v1(75.3,54.21)
SW: J8.5 U2.23 | length 15
  Bottom Layer w0.8: J8.5@57.75,38.126 57.75,43.925 60.439,46.614 60.439,50.936 60.509,51.006 60.509,51.89 U2.23
TXD: J2.2 U2.34 | length 20
  Top Layer w0.8: v1(41.946,64.508) 43.688,66.25 49.679,66.25 v1(51.479,64.45)
  Bottom Layer w0.8: J2.2 v1(41.946,64.508) ; v1(51.479,64.45) 56.424,64.45 U2.34
pads on no net: SW1.3 SW2.1 SW2.4 U1_SM1.2 U1_SM1.3 U1_SM1.4 U1_SM2.2 U1_SM2.3 U1_SM2.4 U1_SM3.2 U1_SM3.3 U1_SM3.4 U2.4 U2.5 U2.17 U2.18 U2.19 U2.20 U2.32

## Keep-outs
Keep-Out Layer:
  lines w0.5: -0.026,75.45 cw(c5,75.45) 5,80.476 ; -0.013,4.95 -0.013,4.963 ; 0,4.924 0,75.515 ; 0,4.95 ccw(c5,4.95) 5,-0.05 98.026,-0.05 ; 5,80.493 97.983,80.493 ; 98,-0.05 ccw(c98,4.976) 103.026,4.976 ; 98,80.476 cw(c98,75.45) 103.026,75.45 ; 103,4.924 103,75.476

## Text inside footprints (layer, text, board x,y; h text height)
U1_SM1: Top Overlay "EN" at 101.948,9.846 h1.02 r180
U1_SM2: Top Overlay "EN" at 71.437,10.757 h1.02 r180
U1_SM3: Top Overlay "EN" at 41.773,10.923 h1.02 r180